# EAGLE board RTx_Charger_Alternative2 (EAGLE 6.5.0)
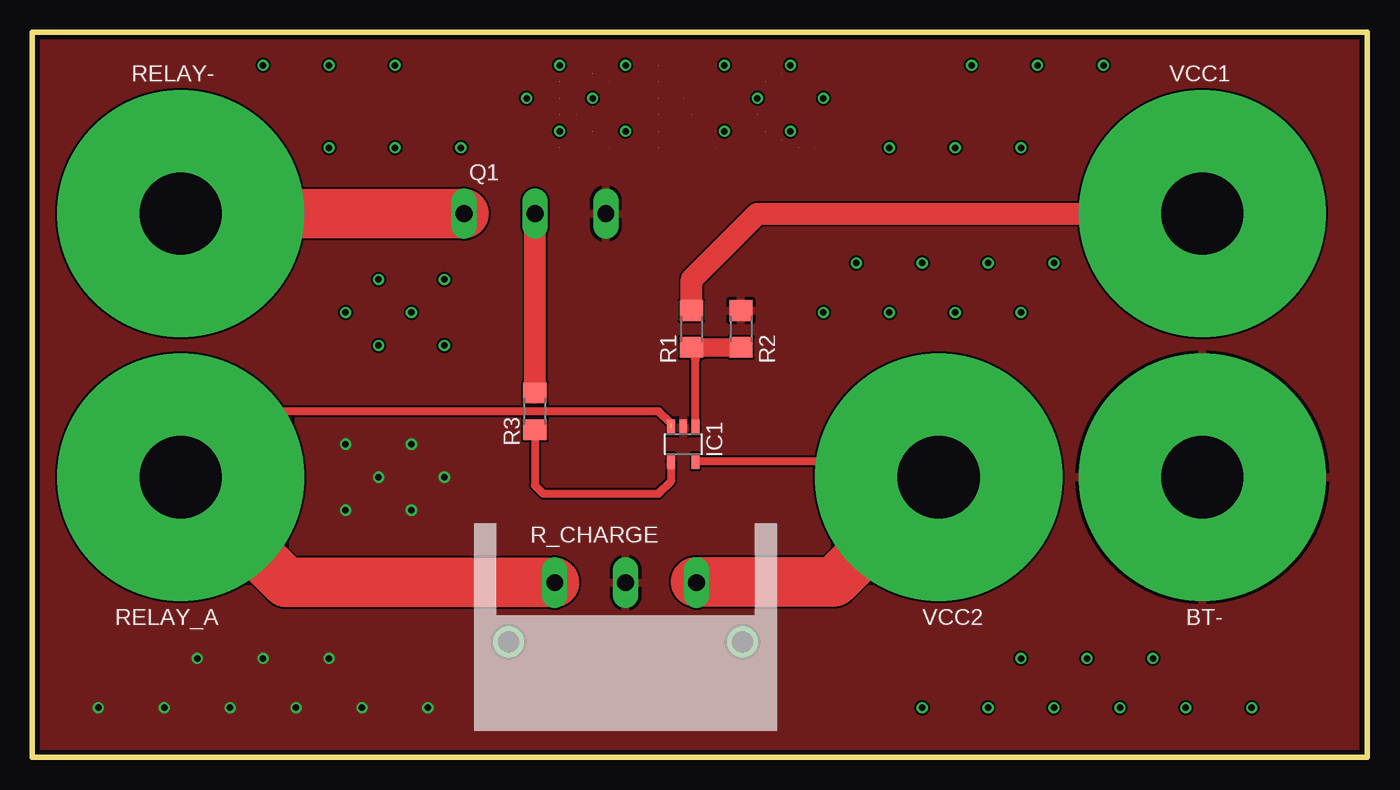
[diagram p0: board, top side]
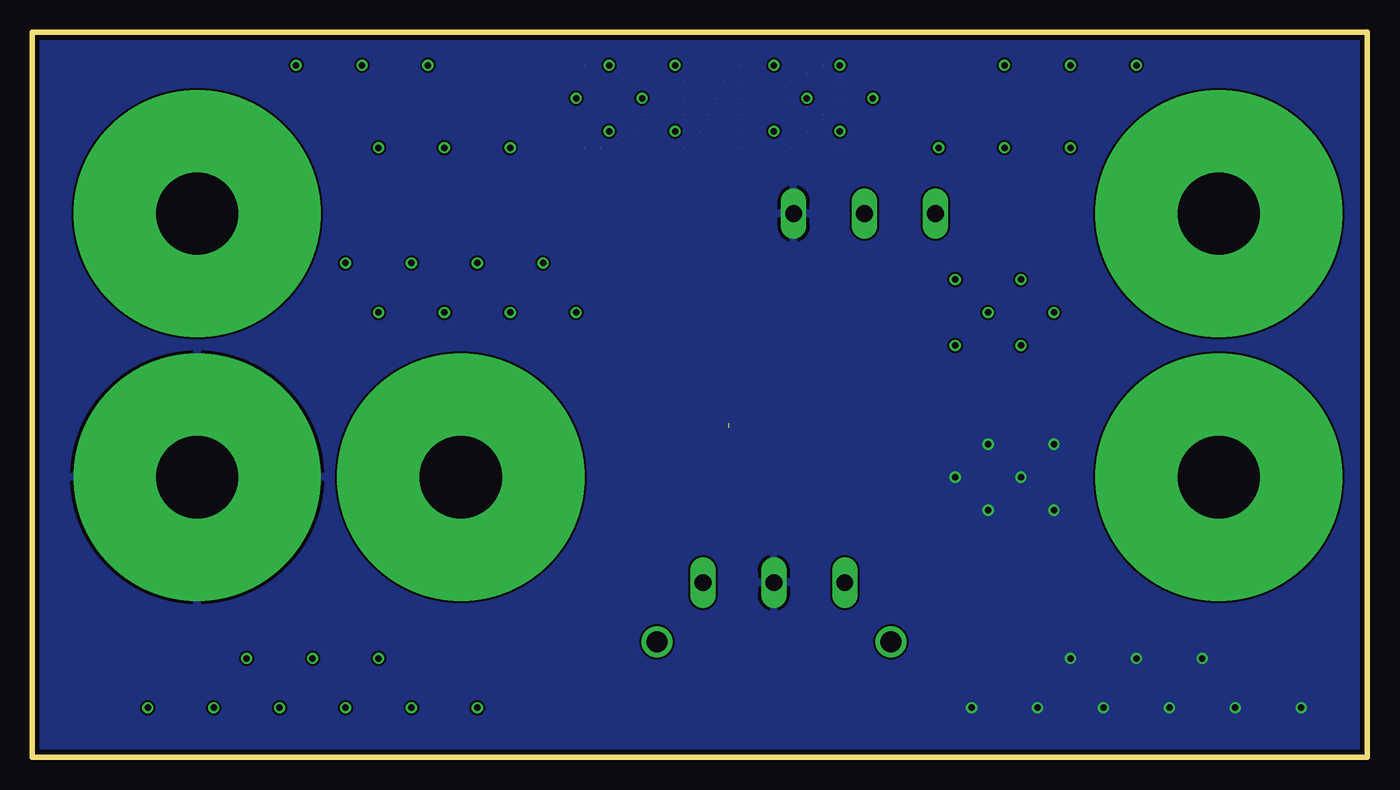
[diagram p1: board, bottom side, seen from below]

Size 102.87 x 55.88 mm. Coordinates in mm from the lower left corner, seen from the top.
Outline: 0,0 102.87,0 102.87,55.88 0,55.88 0,0
Copper layers (1*16): Top 0.0356mm / dielectric 1.5011mm / Bottom 0.0356mm
Design rules "osh-park-2layer": minimum track width 6mil, minimum drill 13mil, track to track 6mil, track to pad 6mil, pad to pad 6mil, via to via 6mil, smd to smd 6mil, copper to edge 15mil, drill to drill 6mil, minimum pad ring 7mil, minimum via ring 7mil, stop-mask expansion 3mil, vias tented up to drill 0mil, thermal gap 10mil

## Footprints (pad centres in the part's own frame; a part is rotated, then mirrored left to right if it is on the bottom)
TERMINAL_BATTERY = drill 6.35 pad 19.05: 1 0,0
DBV-R-PDSO-G5 = smd 0.6 x 1.2: 1 -0.95,-1.306; 2 0,-1.306; 3 0.95,-1.306; 4 0.95,1.306; 5 -0.95,1.306
TO-247 = drill 1.3 long: 1 -5.461,0; 2 0,0; 3 5.461,0
R1206 = smd 1.6 x 1.803: 1 -1.422,0; 2 1.422,0
WA-T247-101E = drill 1.3 long: 1 -5.461,-4.572; 2 0,-4.572; 3 5.461,-4.572 | drill 1.6: P$1 -9.017,0; P$2 9.017,0

## Placement (x,y rotation side)
BT-  TERMINAL  [TERMINAL_BATTERY]  90.17,21.59 0 top
IC1  TL331  [DBV-R-PDSO-G5]  50.16,24.13 180 top
Q1  STW11NM80  [TO-247]  38.73,41.91 0 top
R1  10k  [R1206]  50.8,33.02 90 top
R2  230k  [R1206]  54.61,33.02 90 top
R3  0  [R1206]  38.73,26.67 270 top
R_CHARGE  10  [WA-T247-101E]  45.72,8.89 180 top
RELAY-  TERMINAL  [TERMINAL_BATTERY]  11.43,41.91 0 top
RELAY_A  TERMINAL  [TERMINAL_BATTERY]  11.43,21.59 0 top
VCC1  TERMINAL  [TERMINAL_BATTERY]  90.17,41.91 0 top
VCC2  TERMINAL  [TERMINAL_BATTERY]  69.85,21.59 0 top

## Library data of the parts
BT- Q1 R_CHARGE RELAY- RELAY_A VCC1 VCC2 = temp_library
IC1 = linear
R1-R3 = motorFeedback

## Nets
GND: BT-.1 IC1.2 Q1.3 R2.2 R_CHARGE.2
N$1: IC1.4 R3.2
N$5: Q1.2 R3.1
REFERENCE: IC1.1 R1.1 R2.1
RELAY-: Q1.1 RELAY-.1
RELAY_A: IC1.3 R_CHARGE.3 RELAY_A.1
VCC1: R1.2 VCC1.1
VCC2: IC1.5 R_CHARGE.1 VCC2.1

## Tracks (layer width: path | path; a pad name or v marks a point on that pad's centre or on a via)
GND  (via drill 0.5)  (40 unrouted)
  other vias: 5.08,3.81 10.16,3.81 15.24,3.81 20.32,3.81 25.4,3.81 30.48,3.81 22.86,7.62 17.78,7.62 12.7,7.62 24.13,19.05 26.67,21.59 24.13,24.13 29.21,24.13 29.21,19.05 31.75,21.59
  pour Top: 0,0 102.87,0 102.87,55.88 0,55.88
  pour Bottom: 0,0 102.87,0 102.87,55.88 0,55.88
GND1  (via drill 0.5)
  other vias: 31.75,36.83 29.21,34.29 31.75,31.75 26.67,31.75 26.67,36.83 24.13,34.29
GND2  (via drill 0.5)
  other vias: 68.58,3.81 73.66,3.81 78.74,3.81 83.82,3.81 88.9,3.81 93.98,3.81
GND3  (via drill 0.5)
  other vias: 63.5,38.1 68.58,38.1 73.66,38.1 78.74,38.1
GND4  (via drill 0.5)
  other vias: 60.96,34.29 66.04,34.29 71.12,34.29 76.2,34.29
GND5  (via drill 0.5)
  other vias: 86.36,7.62 81.28,7.62 76.2,7.62
GND6  (via drill 0.5)
  other vias: 82.55,53.34 77.47,53.34 72.39,53.34
GND7  (via drill 0.5)
  other vias: 76.2,46.99 71.12,46.99 66.04,46.99
GND8  (via drill 0.5)
  other vias: 27.94,53.34 22.86,53.34 17.78,53.34
GND9  (via drill 0.5)
  other vias: 33.02,46.99 27.94,46.99 22.86,46.99
GND10  (via drill 0.5)
  other vias: 45.72,53.34 43.18,50.8 45.72,48.26 40.64,48.26 40.64,53.34 38.1,50.8
GND11  (via drill 0.5)
  other vias: 53.34,48.26 55.88,50.8 53.34,53.34 58.42,53.34 58.42,48.26 60.96,50.8
N$1
  Top 0.61: IC1.4 49.22,21.27 48.26,20.32 39.37,20.32 38.73,20.95 R3.2
N$5
  Top 1.676: R3.1 Q1.2
REFERENCE
  Top 0.61: IC1.1 51.12,30.64 R1.1
  Top 1.422: R1.1 R2.1
RELAY-
  Top 3.81: RELAY-.1 Q1.1
RELAY_A  (1 unrouted)
  Top 0.61: 49.22,25.71 48.26,26.67 16.51,26.67 RELAY_A.1
  Top 3.81: R_CHARGE.3 19.56,13.46 RELAY_A.1
VCC1
  Top 1.676: R1.2 50.8,36.83 55.88,41.91 VCC1.1
VCC2
  Top 0.61: 51.12,13.53 R_CHARGE.1 | IC1.5 68.62,22.82 VCC2.1
  Top 3.81: 51.12,13.53 61.79,13.53 VCC2.1